# Altium PCB Main.PcbDoc
Units mil, origin at the board's own origin, x right, y up, seen from the top; angles counter-clockwise.
Board outline 2231.89 x 2481.84 mil, 2 copper layers (Top Layer, Bottom Layer); 54 components, 54 nets, 190 pads, 46 vias.
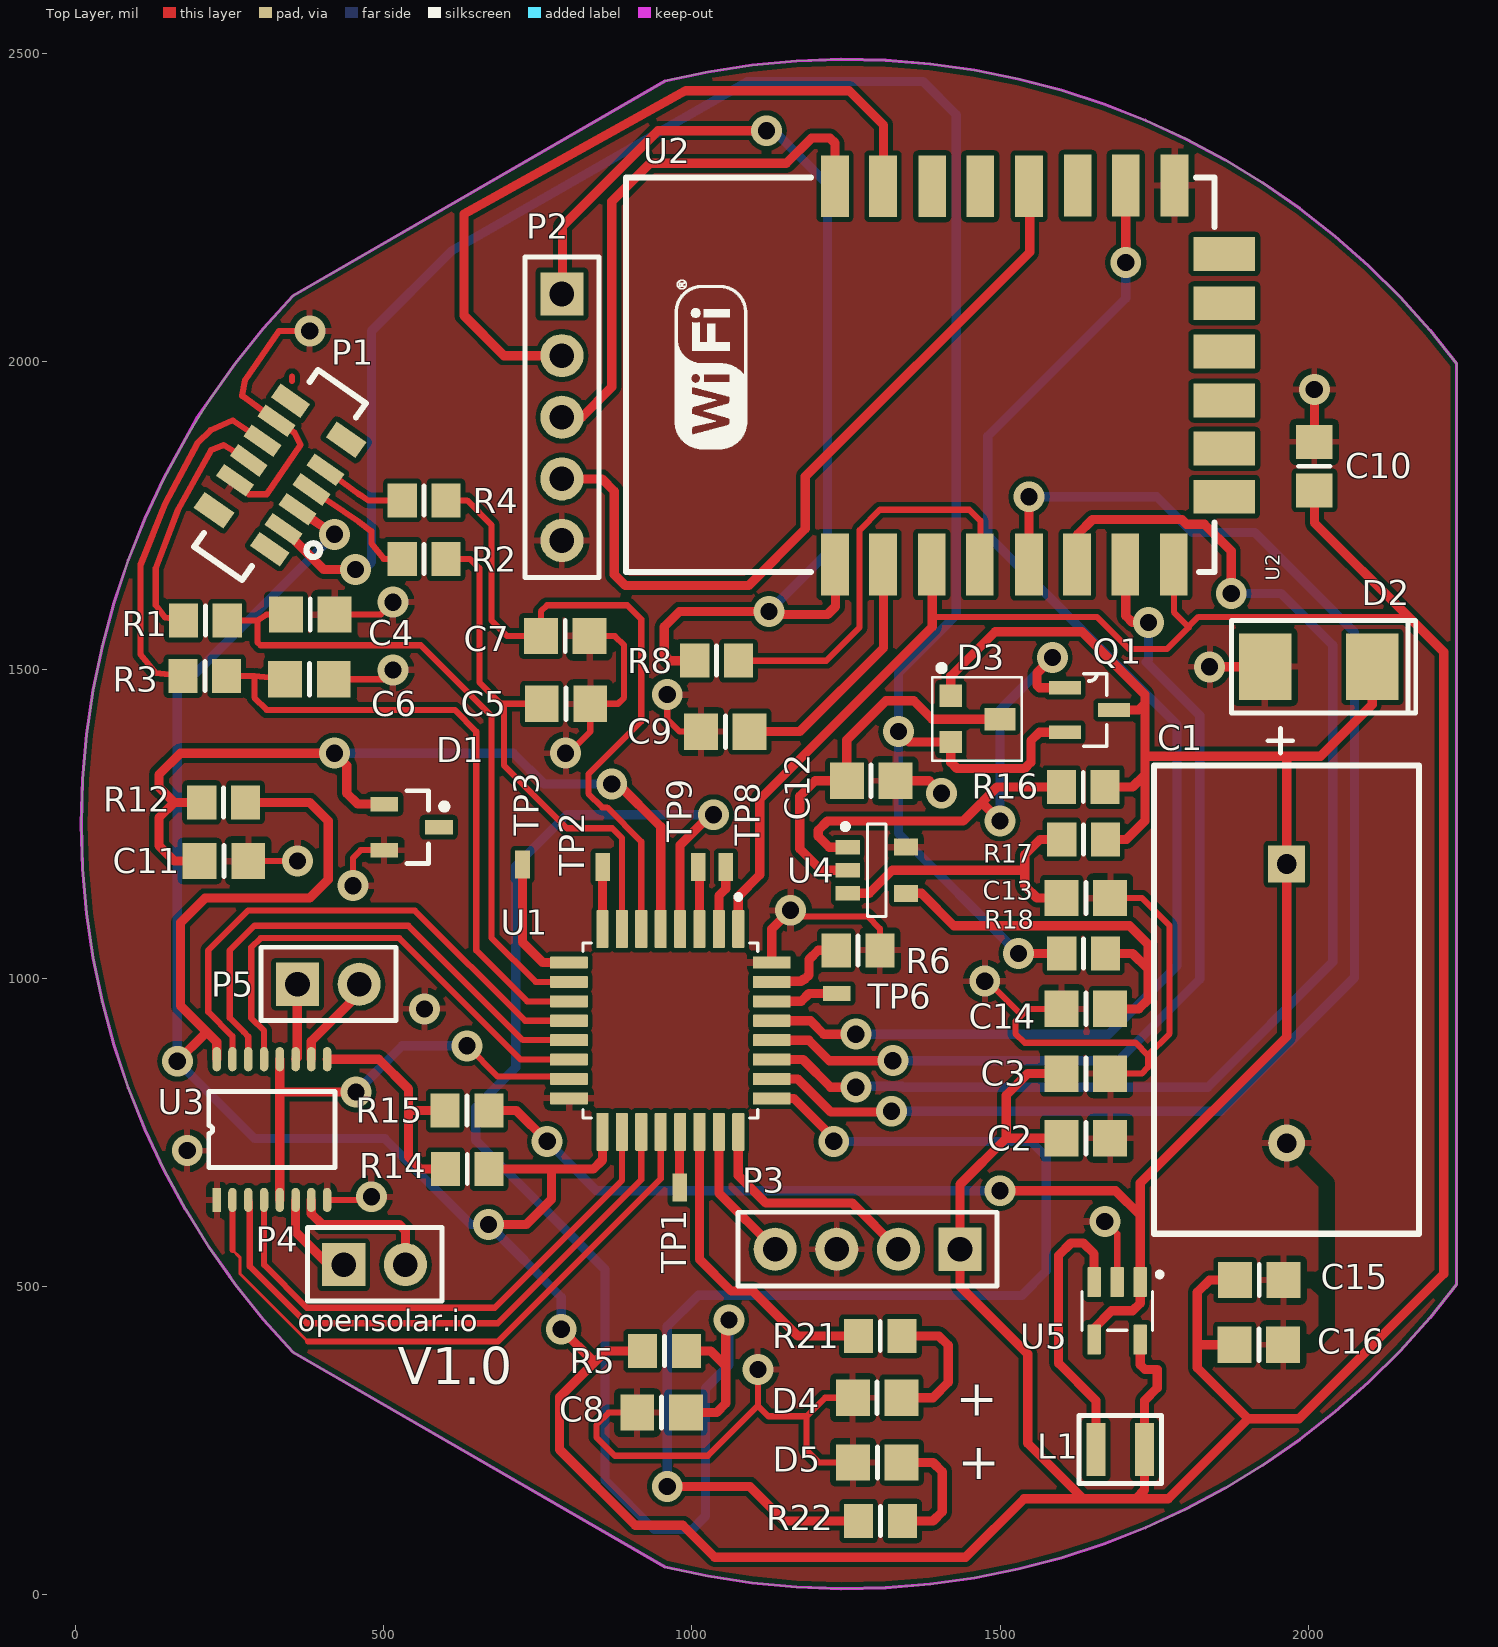
[diagram p0: Top Layer view]
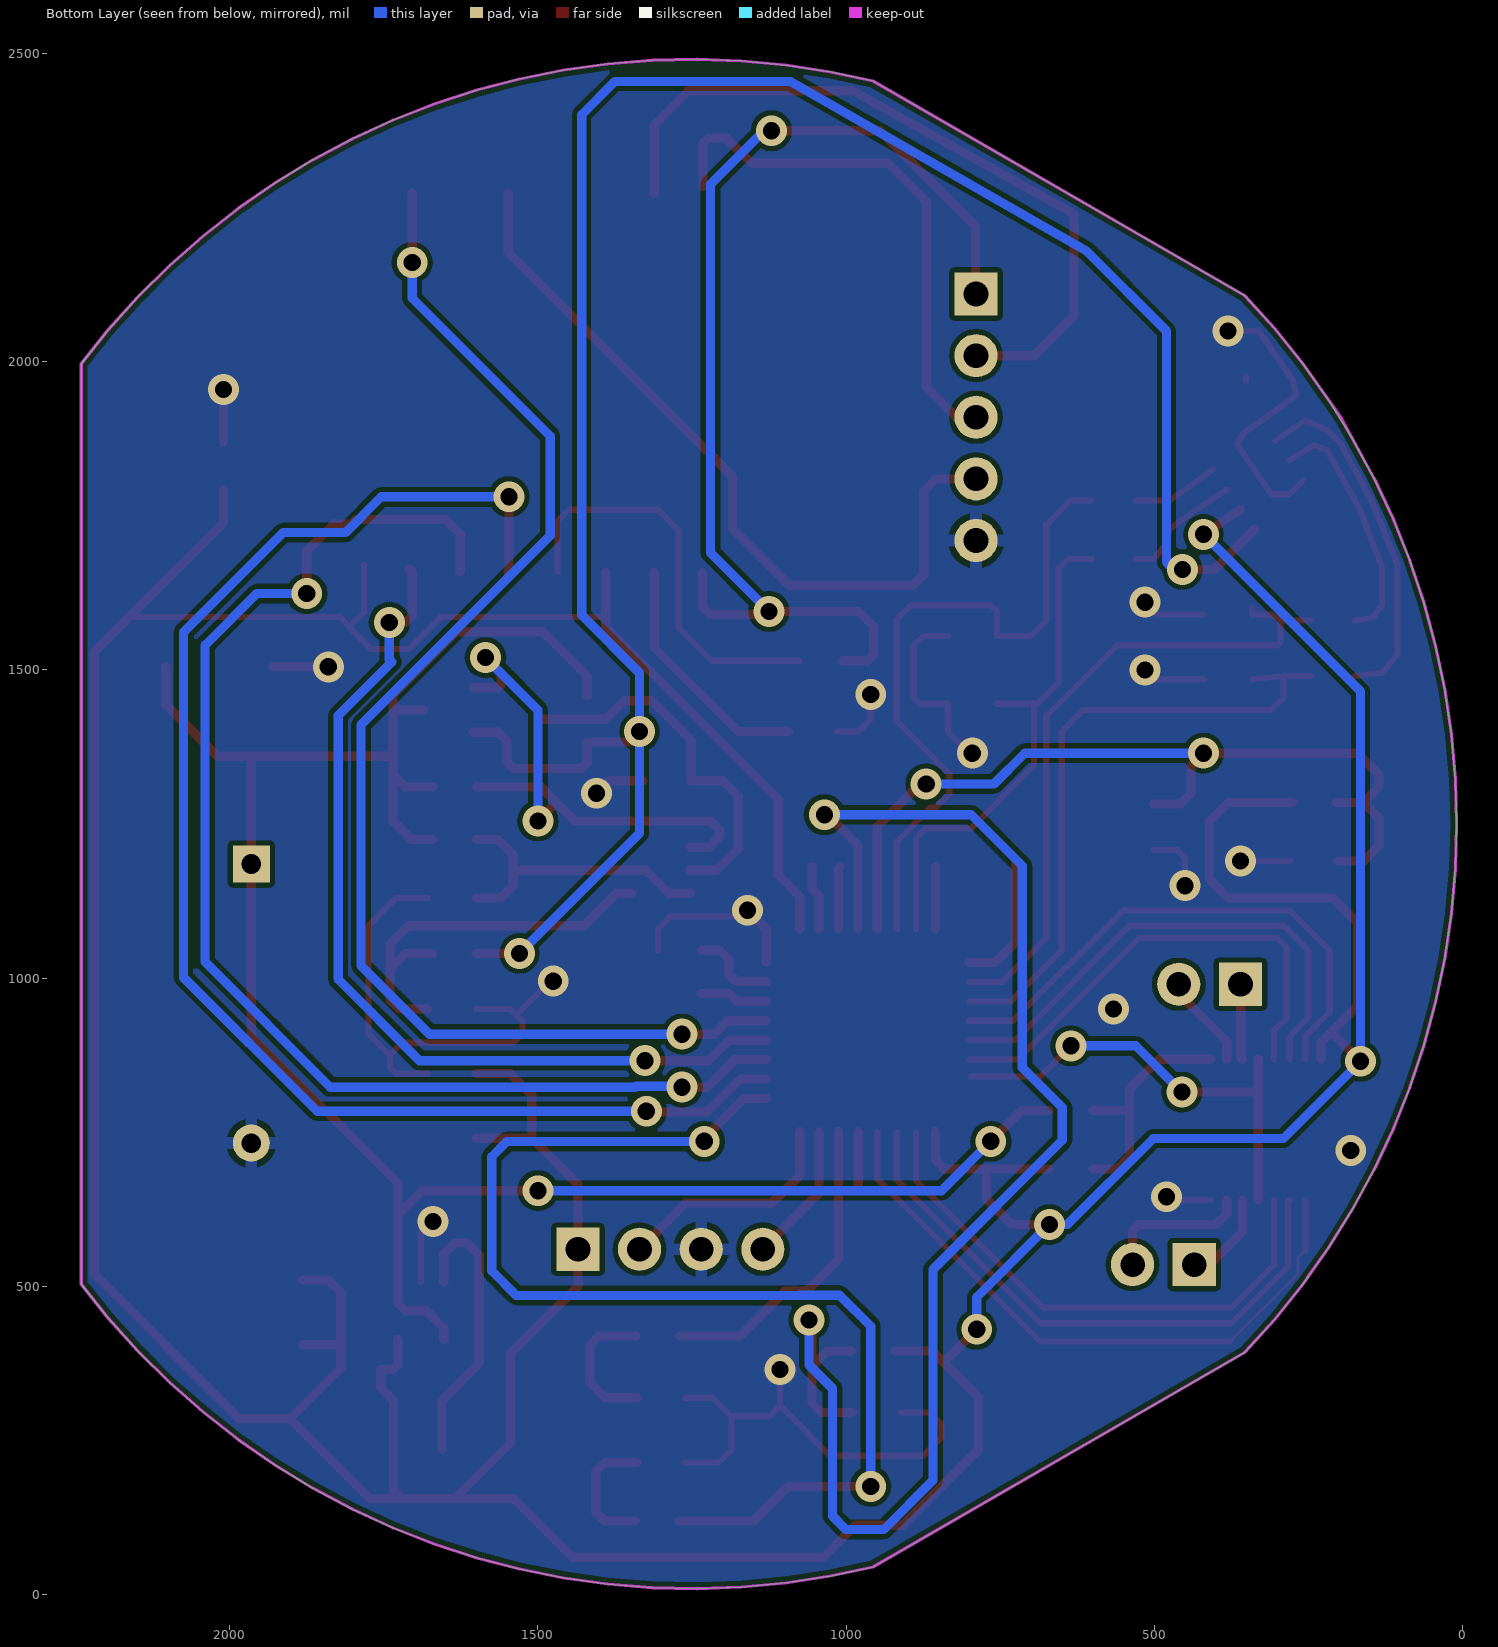
[diagram p1: Bottom Layer view, seen from below]

## Layer stack, top to bottom
Top Solder: solder mask 0.4, Solder Resist, Dk 3.5
Top Layer: signal copper 1.4
Dielectric 1: dielectric 12.6, FR-4, Dk 4.8
Bottom Layer: signal copper 1.4
Bottom Solder: solder mask 0.4, Solder Resist, Dk 3.5

## Board outline
259.08,503 251.65,513.48 250.88,514.25 cw(c254.41,517.81) 249.61,516.35 216.94,562.44 178.37,624.26 143.49,688.23 112.43,754.14 85.29,821.76 62.16,890.85 43.13,961.18 28.26,1032.51 17.61,1104.59 11.2,1177.17 9.06,1250 11.2,1322.83 17.61,1395.41 28.26,1467.49 43.13,1538.82 62.16,1609.15 85.29,1678.24 112.43,1745.86 143.49,1811.77 178.37,1875.74 216.94,1937.56 259.08,1997 304.63,2053.87 352.66,2107.11 956.4,2455.68 1026.07,2470.57 1097.63,2481.55 1169.72,2488.34 1242.08,2490.92 1314.46,2489.27 1386.63,2483.4 1458.33,2473.33 1529.32,2459.1 1599.37,2440.75 1668.22,2418.35 1735.65,2391.97 1801.42,2361.7 1865.32,2327.65 1927.12,2289.93 1986.62,2248.67 2043.61,2204 2097.9,2156.1 2149.3,2105.1 2197.64,2051.2 2240.95,1996.84 2240.95,503.16 2197.64,448.8 2149.3,394.9 2097.9,343.9 2043.61,296 1986.62,251.33 1927.12,210.07 1865.32,172.35 1801.42,138.3 1735.65,108.03 1668.22,81.65 1599.37,59.25 1529.32,40.9 1458.33,26.67 1386.63,16.6 1314.46,10.73 1242.08,9.08 1169.72,11.66 1097.63,18.45 1026.07,29.43 956.4,44.32 352.65,392.89 304.63,446.13

## Design rules (kind name [scope] priority, off if disabled: settings)
BoardOutlineClearance [All] p1: gap=7.87 ignorepadtopadclearanceinfootprint=FALSE except(15.75: Arc-SplitBarrior Arc-SplitContinuation Track-SplitBarrior Track-SplitContinuation SMDPad-SplitBarrior SMDPad-SplitContinuation THPad-SplitBarrior THPad-SplitContinuation Via-SplitBarrior Via-SplitContinuation Fill-SplitBarrior Fill-SplitContinuation Poly-SplitBarrior Poly-SplitContinuation Region-SplitBarrior Region-SplitContinuation Text-SplitBarrior Text-SplitContinuation)
Clearance "Clearance Bottom Layer" [OnLayer('Bottom Layer')] p1: gap=8 ignorepadtopadclearanceinfootprint=TRUE except(10: Arc-Text Track-Text SMDPad-Text THPad-Text Via-Text Fill-Text Poly-Text Region-Text Text-Text)
Clearance "Clearance Top Layer" [OnLayer('Top Layer')] p2: gap=8 ignorepadtopadclearanceinfootprint=TRUE except(10: Arc-Text Track-Text SMDPad-Text THPad-Text Via-Text Fill-Text Poly-Text Region-Text Text-Text)
Clearance [All] p3: gap=7.87 ignorepadtopadclearanceinfootprint=FALSE except(3.5: Arc-Arc Arc-Track Arc-SMDPad Track-Track Track-SMDPad SMDPad-SMDPad; 5: Arc-Via Track-Via SMDPad-Via THPad-Via Via-Via; 10: Arc-Text Track-Text SMDPad-Text THPad-Text Via-Text Fill-Text Poly-Text Region-Text Text-Text)
HoleSize [All] p1: absolutevalues=TRUE maxlimit=248.03 minlimit=7.87 maxpercent=80.000 minpercent=20.000
MinimumAnnularRing [All] p1: minimumring=3
MinimumSolderMaskSliver [All] p1: minsoldermaskwidth=3.94
PolygonConnect [All vs IsNamedPolygon('Top Layer-GND')] p1: connectstyle=Relief reliefconductorwidth=10 reliefentries=4 polygonreliefangle="90 Angle" airgapwidth=10
PolygonConnect PolygonConnect_1 [All] p2: thpad.connectstyle=Relief thpad.reliefconductorwidth=20 thpad.reliefentries=4 thpad.polygonreliefangle="90 Angle" thpad.airgapwidth=10 smdpad.connectstyle=Relief smdpad.reliefconductorwidth=20 smdpad.reliefentries=4 smdpad.polygonreliefangle="90 Angle" smdpad.airgapwidth=10 via.connectstyle=Direct via.reliefconductorwidth=20 via.reliefentries=4 via.polygonreliefangle="90 Angle" via.airgapwidth=10
RoutingCorners [All] p1: cornerstyle=Round minsetback=100 maxsetback=100
RoutingVias [All] p1: holewidth=19.68 width=39.37 viastyle="Through Hole" minholewidth=7.87 minwidth=17.72 maxholewidth=39.37 maxwidth=78.74
SilkToSilkClearance [All] p1: silktosilkclearance=3.94
SilkToSolderMaskClearance [IsPad] p1: minsilkscreentomaskgap=3.94 clearancetoexposedcopper=TRUE
SolderMaskExpansion [All] p1: expansion=4
Width [All] p1: maxlimit=100 minlimit=3.5 preferedwidth=15
25 further rules are at their usual default settings.

## Classes and differential pairs
component class power: C1 C12 C13 C14 C15 C16 D2 D3 L1 Q1 R16 R17 R18 U4 U5
component class Main: C2 C3 C4 C5 C6 C7 C8 C9 C10 C11 D1 D4 D5 P1 P2 P3 P4 P5 R1 R2 R3 R4 R5 R6 R8 R12 R14 R15 R21 R22 TP1 TP2 TP3 TP6 TP8 TP9 U U1 U2 U3

## Components (designator, comment, footprint, x,y, rotation, side; value= is the part's Value field where it differs from the comment)
C1 "Cap Pol1" SCMR22H155PSBB0 1965,1185 r270 top value=1.5F
C2 "1uF" 6-0805_M 1639.37,740 r180 top
C3 "1uF" 6-0805_M 1639.37,845 r180 top
C4 "1uF" 6-0805_M 380.63,1590 r180 top
C5 "1uF" 6-0805_M 795.63,1445 r180 top
C6 "1uF" 6-0805_M 379.37,1485 r180 top
C7 "1uF" 6-0805_M 794.37,1555 r180 top
C8 "1uF" 6-0805_M 950.63,295 r0 top
C9 "1uF" 6-0805_M 1054.37,1400 r0 top
C10 "1uF" 6-0805_M 2010,1830.63 r270 top
C11 "1uF" 6-0805_M 240.63,1190 r180 top
C12 "1uF" 6-0805_M 1290.63,1320 r180 top
C13 "1uF" 6-0805_M 1639.37,1130 r180 top
C14 "1uF" 6-0805_M 1639.37,950 r0 top
C15 "10uF" 6-0805_M 1920.63,510 r180 top
C16 "1uF" 6-0805_M 1920,405 r180 top value=100nF
D1 "LM4040D30FTA" SOT23_LM4040 545,1245 r0 top
D2 "1SMB5918BT3G" SMB 2017.01,1505 r0 top value=5.1V
D3 "BAT54CLT1G" SOT23-DUODIODE 1420,1458 r0 top
D4 "RED" 6-0805_M 1300.37,319 r180 top
D5 "BLUE" 6-0805_M 1301,214 r180 top
L1 "CIGW252010GL4R7MNE" "INDUCTOR_2520 - DUPLICATE1" 1695,235 r0 top value=4.7uH
P1 "Hall & PV" FFC_8 314.67,1696 r55 top
P2 "ESP serial" HEADER-1X5 789,2110 r0 top
P3 "ST-LINK" HEADER-1X4 1435,560 r270 top
P4 "roll motor" HEADER-1X2 435,535 r90 top
P5 "pitch motor" HEADER-1X2 360,990 r90 top
Q1 "PMV35EPER" PMV35EPER 1645,1435 r0 top
R1 "10K" 6-0805_N 210.43,1580 r180 top
R2 "10K" 6-0805_N 565.43,1680 r180 top
R3 "10K" 6-0805_N 209.57,1490 r180 top
R4 "10K" 6-0805_N 565.43,1775 r180 top
R5 "10K" 6-0805_N 955.43,395 r0 top
R6 "10K" 6-0805_N 1269.57,1045 r180 top
R8 "3.3K" 6-0805_N 1040,1515 r0 top
R12 "33R" 6-0805_N 240,1285 r0 top
R14 "0R" 6-0805_N 635.43,690 r0 top
R15 "10M" 6-0805_N 635,785 r0 top value=0R
R16 "1K" 6-0805_N 1635,1310 r0 top
R17 "10K" 6-0805_N 1635.43,1225 r180 top
R18 "10K" 6-0805_N 1635.43,1040 r0 top
R21 "47R" 6-0805_N 1305.57,419 r180 top
R22 "47R" 6-0805_N 1306,119 r180 top
TP1 "TEST_POINT" TEST_POINT_PAD 980,660 r90 top
TP2 "TEST_POINT" TEST_POINT_PAD 855,1180 r270 top
TP3 "TEST_POINT" TEST_POINT_PAD 725,1184 r270 top
TP6 "TEST_POINT" TEST_POINT_PAD 1235,975 r0 top
TP8 "TEST_POINT" TEST_POINT_PAD 1055,1180 r270 top
TP9 "TEST_POINT" TEST_POINT_PAD 1010,1180 r90 top
U1 "STM32L011K4T6" QFP80P900X900X160-32N 965,915 r270 top
U2 "ESP8266 ESP-12-E" "ESP8266 ESP-12-E" 1878,2324 r90 top
U3 "TB6652PNG" SSOP16_TB6652 228.82,640 r90 top
U4 "MIC7221YM5" MIC7221YM5 1300,1175 r90 top
U5 "PAM2301CAAB330" SOT95P280X100-5N 1690,460 r270 top

## Footprints (in the part's own frame and the unit in brackets; to place one, negate y for a bottom-side part, rotate by r counter-clockwise, add the part's x,y. Pads: shape width x height; smd on the part's side, far side on the other; paste and mask are expansions set on the pad)
6-0805_M [mm] "Chip Resistor, Body 2.0x1.2mm, IPC Low Density"
  rect 1.4x1.5 smd: 1(-1,0) 2(1,0)
  silkscreen extent 0,-0.65 0,0.65, body extent -1.07,-0.7 1.07,0.7, height 0.7
6-0805_N [mm] "Chip Resistor, Body 2.0x1.2mm, IPC Medium Density"
  rect 1.2x1.4 smd: 1(-0.9,0) 2(0.9,0)
  silkscreen extent 0,-0.6 0,0.6, body extent -1.07,-0.7 1.07,0.7, height 0.7
"ESP8266 ESP-12-E" [mil] "ESP8266 ESP-12-E"
  rect 100x45 smd: 1(-653,646) 2(-653,568) 3(-653,489) 4(-653,411) 5(-653,331) 6(-653,253) 7(-653,175) 8(-653,96) 15(-38,95) 16(-38,174) 17(-38,252) 18(-39,331) 19(-39,410) 20(-39,488) 21(-39,568) 22(-39,646)
  rect 55x100 smd: 9(-543,14) 10(-465,14) 11(-387,14) 12(-307,14) 13(-229,14) 14(-149,14)
  silkscreen extent -665,30 -25,985, body extent -661,37 -31,981, height 86
FFC_8 [mm]
  rect 0.6x1.5 smd: 1(1,0) 2(1.5,2.8) 3(2,0) 4(2.5,2.8) 5(3,0) 6(3.5,2.8) 7(4,0) 8(4.5,2.8)
  rect 0.7x1.5 smd: 9(5.5,2.8) 12(0,0)
  rect 0.8x1.5 smd: 10(5.5,0) 11(0,2.8)
  silkscreen extent -1.7,-1.78 7.2,2.6, body extent -1.7,0.2 7.2,2.6, height 4
HEADER-1X2 [mil]
  rect 70x70 hole 40: 1(0,0)
  round 70 hole 40: 2(0,-100)
  silkscreen extent -59,-159 60,59, body extent -50,-150 50,50, height 315
HEADER-1X4 [mil]
  rect 70x70 hole 40: 1(0,0)
  round 70 hole 40: 2(0,-100) 3(0,-200) 4(0,-300)
  silkscreen extent -60,-360 60,60, body extent -50,-350 50,50, height 470
HEADER-1X5 [mil]
  rect 70x70 hole 40: 1(0,0)
  round 70 hole 40: 2(0,-100) 3(0,-200) 4(0,-300) 5(0,-400)
  silkscreen extent -60,-460 60,60, body extent -50,-450 50,50, height 470
"INDUCTOR_2520 - DUPLICATE1" [mm]
  rect 0.8x2.2 smd: 1(-1,0) 2(1,0)
  silkscreen extent -1.7,-1.4 1.7,1.4
MIC7221YM5 [mm]
  rect 0.6x1 smd: 1(0.95,1.2) 2(0,1.2) 3(-0.95,1.2)
  rect 0.7x1 smd: 4(-0.95,-1.2) 5(0.95,-1.2)
  silkscreen extent -1.9,-0.38 1.9,1.4
PMV35EPER [mil] "MOSFET P SOT-23"
  rect 52x22 smd: 1(-40,36) 2(-40,-36) 3(40,0)
  silkscreen extent -9,-59 28,59
QFP80P900X900X160-32N [mm]
  rrect14% 1.56x0.5 smd mask+0.09: 1(-4.18,2.8) 2(-4.18,2) 3(-4.18,1.2) 4(-4.18,0.4) 5(-4.18,-0.4) 6(-4.18,-1.2) 7(-4.18,-2) 8(-4.18,-2.8) 17(4.18,-2.8) 18(4.18,-2) 19(4.18,-1.2) 20(4.18,-0.4) 21(4.18,0.4) 22(4.18,1.2) 23(4.18,2) 24(4.18,2.8)
  rrect14% 0.5x1.56 smd mask+0.09: 9(-2.8,-4.18) 10(-2,-4.18) 11(-1.2,-4.18) 12(-0.4,-4.18) 13(0.4,-4.18) 14(1.2,-4.18) 15(2,-4.18) 16(2.8,-4.18) 25(2.8,4.18) 26(2,4.18) 27(1.2,4.18) 28(0.4,4.18) 29(-0.4,4.18) 30(-1.2,4.18) 31(-2,4.18) 32(-2.8,4.18)
  silkscreen extent -5.6,-3.6 3.6,3.6
SCMR22H155PSBB0 [mil]
  rect 60x60 hole 32: 1(0,0)
  round 60 hole 31.5: 2(452.76,0)
  silkscreen extent -220,-215 600,215
SMB [mil]
  rect 85x107.99 smd: 1(-87.01,0) 2(87.01,0)
  silkscreen extent -142,-75 157,75
SOT23-DUODIODE [mil]
  rect 36x36 smd: 1(0,0) 2(0,-75)
  rect 50x36 smd: 3(80,-38)
  silkscreen extent -30,-105 115,50, body extent -4,-95 92,20, height 52
SOT23_LM4040 [mm] "SOT23, 3-Leads, Body 2.9x1.3mm, Pitch 0.95mm, Lead Span 2.3mm - Reverse Pinning, IPC Medium Density"
  rect 1.15x0.6 smd: 1(-1.125,-0.95) 2(-1.125,0.95) 3(1.125,0)
  silkscreen extent -0.2,-1.5 1.48,1.5, body extent -0.7,-1.5 0.7,1.5, height 1.1
SOT95P280X100-5N [mm]
  rrect14% 1.24x0.55 smd: 1(-1.185,0.95) 2(-1.185,0) 3(-1.185,-0.95) 4(1.185,-0.95) 5(1.185,0.95)
  silkscreen extent -1.6,-1.45 0.8,1.85
SSOP16_TB6652 [mm]
  rect 1x0.35 smd mask+0.102: 1(0,0)
  oval 1x0.35 smd mask+0.08: 2(0,-0.65) 3(0,-1.3) 4(0,-1.95) 5(0,-2.6) 6(0,-3.25) 7(0,-3.9) 8(0,-4.55) 9(5.8,-4.55) 10(5.8,-3.9) 11(5.8,-3.25) 12(5.8,-2.6) 13(5.8,-1.95) 14(5.8,-1.3) 15(5.8,-0.65) 16(5.8,0)
  silkscreen extent 1.33,-4.88 4.47,0.33
TEST_POINT_PAD [mm]
  rect 1.15x0.6 smd: 1(0,0)

## Part data
C1: "Polarized Capacitor (Radial)", LatestRevisionDate=17-Jul-2002, LatestRevisionNote="Re-released for DXP Platform.", PackageDescription="Polarized Capacitor (Radial); 2 Leads", PackageReference=RB7.6-15, Published=8-Jun-2000, Publisher="Altium Limited"
C2 C3 C4 C5 C6 C7 C8 C9 C10 C11 C12 C13 C14 C16: library part Cap, "Capacitor", jlc=C28323, LatestRevisionDate=17-Jul-2002, LatestRevisionNote="Re-released for DXP Platform.", PackageDescription="Radial Cap, Thru-Hole; 2 Leads; 0.3 in Pin Spacing", PackageReference=RAD-0.3, Published=8-Jun-2000, Publisher="Altium Limited"
C15: library part Cap, jlc=C15850, LatestRevisionDate=17-Jul-2002, LatestRevisionNote="Re-released for DXP Platform.", PackageDescription="Radial Cap, Thru-Hole; 2 Leads; 0.3 in Pin Spacing", PackageReference=RAD-0.3, Published=8-Jun-2000, Publisher="Altium Limited"
D1: library part "D Zener", "Zener Diode", LatestRevisionDate=17-Jul-2002, LatestRevisionNote="Re-released for DXP Platform.", PackageDescription="Diode, Thru-Hole; 2 Leads; 0.7 in Pin Spacing", PackageReference=DIODE-0.7, Published=8-Jun-2000, Publisher="Altium Limited"
D2: library part "D Zener", "Zener Diode", jlc=C142361, LatestRevisionDate=17-Jul-2002, LatestRevisionNote="Re-released for DXP Platform.", PackageDescription="Diode, Thru-Hole; 2 Leads; 0.7 in Pin Spacing", PackageReference=DIODE-0.7, Published=8-Jun-2000, Publisher="Altium Limited"
D3: library part BAT54C-SOT23, "DUAL SCHOTTKY DIODE COMMON CATHODE", Current - Average Rectified (Io) (per Diode)="200mA (DC)", Current - Reverse Leakage @ Vr="2µA @ 25V", jlc=C14308, Manufacturer="NXP Semiconductors", Manufacturer Part Number=BAT54C,215, Package / Case="SOT-23-3, TO-236-3, Micro3™, SSD3, SST3", Supplier Part Number=568-1612-1-ND, Voltage - DC Reverse (Vr) (Max)=30V, Voltage - Forward (Vf) (Max) @ If="800mV @ 100mA", Category="Discrete Semiconductor Products", Diode Configuration="1 Pair Common Cathode", Diode Type=Schottky, Mounting Type="Surface Mount", Packaging="Cut Tape (CT)", Reverse Recovery Time (trr)=5ns, RoHS="RoHS Compliant", Speed="Small Signal =< 200mA (Io), Any Speed", Supplier=Digi-Key, Supplier 1=Digi-Key, Supplier Part Number 1=568-1612-1-ND
D4: library part LED2, "Typical RED, GREEN, YELLOW, AMBER GaAs LED", jlc=C72037, LatestRevisionDate=17-Jul-2002, LatestRevisionNote="Re-released for DXP Platform.", PackageDescription="SM LED; 2 Flat Leads", PackageReference=3.2X1.6X1.1, PackageVersion=Feb-2002, Published=8-Jun-2000, Publisher="Altium Limited"
D5: library part LED2, "Typical RED, GREEN, YELLOW, AMBER GaAs LED", jlc=C72035, LatestRevisionDate=17-Jul-2002, LatestRevisionNote="Re-released for DXP Platform.", PackageDescription="SM LED; 2 Flat Leads", PackageReference=3.2X1.6X1.1, PackageVersion=Feb-2002, Published=8-Jun-2000, Publisher="Altium Limited"
L1: library part Inductor, "Inductor", jlc=C86070, Code_IEC=1005, Code_JEITA=0402, LatestRevisionDate=29-May-2009, LatestRevisionNote="IPC-7351 Footprint Added.", PackageDescription="Chip Inductor", PackageReference=0402-A, Published=8-Jun-2000, Publisher="Altium Limited"
P1: library part "Header 8", "Header, 8-Pin", LatestRevisionDate=17-Jul-2002, LatestRevisionNote="Re-released for DXP Platform.", Publisher="Altium Limited"
P2: library part "Header 5", "Header, 5-Pin", LatestRevisionDate=17-Jul-2002, LatestRevisionNote="Re-released for DXP Platform.", Publisher="Altium Limited"
P3: library part "Header 4", "Header, 4-Pin", LatestRevisionDate=17-Jul-2002, LatestRevisionNote="Re-released for DXP Platform.", Publisher="Altium Limited"
P4 P5: library part "Header 2", "Header, 2-Pin", LatestRevisionDate=17-Jul-2002, LatestRevisionNote="Re-released for DXP Platform.", Publisher="Altium Limited"
Q1: library part MOSFET-P, "P-Channel MOSFET", LatestRevisionDate=17-Jul-2002, LatestRevisionNote="Re-released for DXP Platform.", PackageDescription="TO, Flat Index; 3 In-Line, Axial Leads; Body Dia. 4.6mm; Lead Dia. 0.5 mm (max)", PackageReference=E3, PackageVersion=1995/1996, Published=8-Jun-2000, Publisher="Altium Limited"
R1 R2 R3 R4 R5 R6 R17 R18: library part Res1, "Resistor", jlc=C17414, LatestRevisionDate=17-Jul-2002, LatestRevisionNote="Re-released for DXP Platform.", PackageDescription="Axial Device, Thru-Hole; 2 Leads; 0.3 in Pin Spacing", PackageReference=AXIAL-0.3, Published=8-Jun-2000, Publisher="Altium Limited"
R8: library part Res1, "Resistor", jlc=C26010, LatestRevisionDate=17-Jul-2002, LatestRevisionNote="Re-released for DXP Platform.", PackageDescription="Axial Device, Thru-Hole; 2 Leads; 0.3 in Pin Spacing", PackageReference=AXIAL-0.3, Published=8-Jun-2000, Publisher="Altium Limited"
R12: library part Res1, "Resistor", jlc=C17634, LatestRevisionDate=17-Jul-2002, LatestRevisionNote="Re-released for DXP Platform.", PackageDescription="Axial Device, Thru-Hole; 2 Leads; 0.3 in Pin Spacing", PackageReference=AXIAL-0.3, Published=8-Jun-2000, Publisher="Altium Limited"
R14: library part Res1, "Resistor", jlc=C17477, LatestRevisionDate=17-Jul-2002, LatestRevisionNote="Re-released for DXP Platform.", PackageDescription="Axial Device, Thru-Hole; 2 Leads; 0.3 in Pin Spacing", PackageReference=AXIAL-0.3, Published=8-Jun-2000, Publisher="Altium Limited"
R15: library part Res1, "Resistor", jlc=C26108, LatestRevisionDate=17-Jul-2002, LatestRevisionNote="Re-released for DXP Platform.", PackageDescription="Axial Device, Thru-Hole; 2 Leads; 0.3 in Pin Spacing", PackageReference=AXIAL-0.3, Published=8-Jun-2000, Publisher="Altium Limited"
R16: library part Res1, "Resistor", jlc=C17513, LatestRevisionDate=17-Jul-2002, LatestRevisionNote="Re-released for DXP Platform.", PackageDescription="Axial Device, Thru-Hole; 2 Leads; 0.3 in Pin Spacing", PackageReference=AXIAL-0.3, Published=8-Jun-2000, Publisher="Altium Limited"
R21 R22: library part Res1, "Resistor", jlc=C17714, LatestRevisionDate=17-Jul-2002, LatestRevisionNote="Re-released for DXP Platform.", PackageDescription="Axial Device, Thru-Hole; 2 Leads; 0.3 in Pin Spacing", PackageReference=AXIAL-0.3, Published=8-Jun-2000, Publisher="Altium Limited"
U1: "ARM® Cortex®-M0 + STM32L0 Microcontrolador IC de 32 bits 32MHz 16KB _16K x 8_ FLASH 32-LQFP _7x7_", jlc=C87904, Package="LQFP-32 STMicroelectronics", Availability=Unavailable, MF=STMicroelectronics, MP=STM32L011K4T6, Price=None, SnapEDA_Link=https://www.snapeda.com/parts/STM32L011K4T6/STMicroelectronics/view-part/491202/?ref=snap
U4: library part MIC7221YM5-TR, "Comparator General Purpose Open Drain SOT-23-5", Package="SOT-23 Microchip", Availability=Unavailable, MF=Microchip, MP=MIC7221YM5-TR, Price=None, SnapEDA_Link=https://www.snapeda.com/parts/MIC7221YM5-TR/Microchip/view-part/1222183/?ref=snap
U5: library part PAM2301CAAB120, "Buck Switching Regulator IC Positive Fixed 1.2V 1 Output 800mA SOT-23-5 Thin, TSOT-23-5", jlc=C9051, Package="SOT-23-5 Diodes Inc.", Availability=Unavailable, MF="Diodes Inc.", MP=PAM2301CAAB120, Price=None, SnapEDA_Link=https://www.snapeda.com/parts/PAM2301CAAB120/Diodes%20Inc./view-part/924331/?ref=snap

## Via types
v1: diameter 50, hole 28, Top Layer to Bottom Layer, 46 vias

## Nets (pads, with @x,y where several pads share a name; then routed paths per layer and width w, separated by ;. In a path a pad name is that pad's centre, name@x,y a point inside that pad or via, vN(x,y) a via of type N, cw(c..) or ccw(c..) an arc to the next point about the centre after c; other vN are vias at no path point)
+3.3V: C2.2 C3.2 C10.2 C15.2 C16.2 L1.2 P1.3 P3.1 R5.1 R12.2 R14.2 U1.1 U1.17 U2.3 U2.8 U3.16 U5.5 | length 9745.5
  Top Layer w10: 1390,1586 1657,1586 1709,1534 1771,1534 1806.37,1569.37 ; U2.8 1782,1593.74 1805.74,1570 1821.74,1586 2163,1586
  Top Layer w15: v1(165,865) 210,910 210,915 ; U3.16 228.82,896.18 210,915 ; R12.2 380,1285 410,1255 410,1160 380,1130 210,1130 170,1090 170,955 210,915 ; P1.3 v1(420,1720) ; v1(670,600) 731,600 772,641 772,690 ; R14.2 772,690 ; v1(788,430) 841,377 841,376 ; U1.17 854.76,704.76 840,690 772,690 ; R5.1 860,395 841,376 ; U1.1 1075,1079.8 1075,1132.47 1110,1167.47 1110,1290 1390,1570 1390,1586 U2.3@1390,1659 ; C2.2 1510,740 ; C3.2 1545,845 1510,810 1510,740 ; U5.5 1727.4,372.6 1735,365 1755,365 1755,335 1734.37,314.37 L1.2 1734.37,169.37 1720,155 ; C16.2 1820,405 ; C15.2 1840,510 1820,490 1820,405 ; C10.2 2010,1739 2163,1586 2220,1529 2220,520 1985,285 1902.75,285 ; 841,376 785,320 785,235 908,112 985,112 1037,60 1444,60 1539,155 1635,155 ; 1510,740 1435,665 P3.1 1435,500 1545,390 1545,245 1635,155 ; 1635,155 1720,155 ; 1720,155 1772.75,155 1902.75,285 ; 1820,405 1820,367.75 1902.75,285
  Bottom Layer w15: v1(420,1720) 165,1465 v1(165,865) 290.5,739.5 501.51,739.5 641.01,600 v1(670,600) 788,482 v1(788,430)
GND: C1.2 C2.1 C3.1 C4.1 C5.1 C6.1 C7.1 C8.1 C9.1 C10.1 C11.1 C12.1 C13.1 C14.1 C15.1 C16.1 D1.1 D2.1 D4.2 D5.2 P1.2 P1.8 P2.5 P3.3 R6.1 U1.16 U1.32 U2.15 U3.1 U3.8 U4.5 U5.2 | length 3596.4
  Top Layer w10: P1.2 280.85,1785 310,1785 365,1865 355,1885 P1.8 270,1945 275,1970 330,2050 v1(380,2050) ; C11.1 v1(360,1190) ; U3.8 475,640 v1(480,645) ; C6.1 500,1485 v1(515,1500) ; C4.1 495,1590 v1(515,1610) ; v1(450,1150) 450,1195 462.6,1207.6 D1.1 ; v1(795,1365) 800,1365 835,1400 C5.1 880,1445 890,1455 890,1540 875,1555 C7.1 ; C8.1 865,295 845,275 845,255 875,225 1026,225 1107,306 ; v1(960,1460) 960,1420 980,1400 C9.1 ; v1(1107,365) 1107,306 ; v1(1160,1110) 1170,1100 1285,1100 1305,1080 R6.1 ; D4.2 1216,319 1186,289 ; D5.2 1206,214 1186,234 1186,289 ; v1(1475,995) 1480,995 1535,940 ; C14.1 1545,950 1535,940 ; v1(1670,605) 1690,585 U5.2 ; C3.1 1730,845 1740,855 1740,875 ; C13.1 1730,1130 1775,1085 1775,910 1740,875 ; 1107,306 1124,289 1186,289 ; 1535,940 1525,930 1525,910 1540,895 1720,895 1740,875
  Top Layer w15: U1.32 1129.57,1079.57 v1(1160,1110) ; C12.1 1385,1320 v1(1405,1300) ; v1(1840,1505) D2.1 ; C10.1 v1(2010,1955)
  other v1: 181,720 566,950
MOTOR_STBY: U1.15 U3.5 U3.12 | length 750.9
  Top Layer w3.5: U1.15@796.69,840 U1.15
  Top Layer w10: v1(635,890) 685,840 U1.15@796.69,840
  Top Layer w15: U3.5 331.18,815 ; U3.12 331.18,815 ; v1(455,815) 331.18,815
  Bottom Layer w15: v1(455,815) 530,890 v1(635,890)
NetC4_2: C4.2 R1.1 U1.10 | length 1089.3
  Top Layer w10: R1.1 295,1580 ; C4.2@341.26,1601.26 C4.2 310,1590 295,1580 ; U1.10 746.26,993.74 675,1065 675,1425 560,1540 300,1540 295,1545 295,1580
NetC5_2: C5.2 R2.1 U1.7 | length 849
  Top Layer w10: R2.1 640,1680 655,1665 655,1480 690,1445 695,1445 ; C5.2 695,1445 ; U1.7 886.26,1227.48 870.74,1243 797,1243 695,1345 695,1445
NetC6_2: C6.2 R3.1 U1.11 | length 1052.7
  Top Layer w10: R3.1 290,1490 ; C6.2 290,1490 ; U1.11 732.76,962.24 650,1045 650,1400 615,1435 310,1435 290,1455 290,1490
NetC7_2: C7.2 R4.1 U1.6 | length 1130.8
  Top Layer w10: R4.1 635,1775 675,1735 675,1580 700,1555 C7.2 755,1595 765,1605 895,1605 917.76,1582.24 917.76,1416.5 832,1330.74 832,1299.26 854.26,1277 862.2,1277 917.76,1221.44 U1.6
NetC8_2: C8.2 R5.2 U1.4 | length 2498.9
  Top Layer w15: U1.4 980.75,1215.75 1030,1265 v1(1035,1265) ; C8.2 1040,295 1055,310 1055,370 ; R5.2 1030,395 1055,370 ; v1(1060,445) 1055,440 1055,370
  Bottom Layer w15: v1(1035,1265) 797,1265 714,1182 714,855 649,790 649,737 859,527 859,185 939,105 1000,105 1022,127 1022,334 1060,372 v1(1060,445)
NetC9_2: C9.2 U2.2 | length 396.6
  Top Layer w15: C9.2 1175,1400 1311,1536 U2.2@1311,1659
NetC12_2: C12.2 D3.3 U4.2 | length 617.7
  Top Layer w15: U4.2 1210,1175 1175,1210 1175,1295 1200,1320 C12.2 1251.26,1386.26 1315,1450 1360,1450 1390,1420 D3.3
NetC13_2: C13.2 R17.2 U4.3 | length 491.4
  Top Layer w15: U4.3 1287.6,1137.6 1325,1175 1540,1175 ; C13.2 1560,1130 1540,1150 1540,1175 ; R17.2 1565,1225 1540,1200 1540,1175
NetC14_2: C14.2 R18.2 U4.4 | length 663.9
  Top Layer w15: U4.4 1372.4,1137.6 1425.03,1084.97 1710.03,1084.97 1740,1055 1740,1015 ; R18.2 1715,1040 1740,1015 ; C14.2 1725,950 1740,965 1740,1015
NetD4_1: D4.1 R21.1 | length 227.8
  Top Layer w15: D4.1 1391,319 1416,344 1416,404 1401,419 R21.1
NetD5_1: D5.1 R22.1 | length 207.6
  Top Layer w15: D5.1 1391,214 1406,199 1406,134 1391,119 R22.1
NetL1_1: L1.1 U5.3 | length 459
  Top Layer w15: U5.3 1652.6,552.4 1635,570 1615,570 1595,550 1595,375 1655.63,314.37 L1.1
NetP1_4: P1.4 R1.2 | length 397.5
  Top Layer w10: R1.2 145,1585 130,1605 130,1665 166,1760 220,1857 240,1865 P1.4
NetP1_5: P1.5 R2.2 | length 200.8
  Top Layer w10: P1.5@382.42,1792.75 460,1740 480,1725 480,1705 500,1680 R2.2
NetP1_6: P1.6 R3.2 | length 575.3
  Top Layer w10: R3.2 130,1495 105,1525 105,1670.29 145.49,1770 198.16,1868.66 219,1889 255,1905 P1.6
NetP1_7: P1.7 R4.2 | length 141
  Top Layer w10: P1.7 460,1785 475,1775 R4.2
NetP2_1: P2.1 R8.1 U2.1 | length 1823.1
  Top Layer w15: P2.1@790,2110 790,2220 945,2375 v1(1121,2375) ; R8.1 965,1515 955,1525 955,1570 980,1595 v1(1125,1595) 1130,1590 1220,1590 1233,1603 U2.1@1233,1659
  Bottom Layer w15: v1(1121,2375) 1133,2375 1220,2288 1220,1690 v1(1125,1595)
NetP2_2: P2.2 U2.21 | length 1218.9
  Top Layer w15: P2.2@790,2010 695,2010 630,2075 630,2240 990,2440 1255,2440 1311,2384 U2.21@1311,2273
NetP2_3: P2.3 U2.22 | length 880.3
  Top Layer w15: P2.3 821,1910 870,1959 870,2260 932,2322 1153,2322 1194,2363 1224,2363 1232,2355 U2.22
NetP2_4: P2.4 U2.18 | length 1278.6
  Top Layer w15: P2.4 854,1810 874,1790 874,1654.99 891.99,1637 1092,1637 1184,1729 1184,1814 1548,2178 U2.18@1548,2273
NetP4_1: P4.1 U3.6 | length 120
  Top Layer w15: U3.6 356.77,588.23 P4.1@405,540
NetP4_2: P4.2 U3.7 | length 241.4
  Top Layer w15: U3.7 382.36,617.64 400,600 525,600 535,590 P4.2
NetP5_1: P5.1 U3.11 | length 123
  Top Layer w15: U3.11 359.36,870.94 359.36,989.36 P5.1
NetP5_2: P5.2 U3.10 | length 153.8
  Top Layer w15: U3.10 382.36,897.36 460,975 P5.2
NetQ1_1: Q1.1 R16.1 U4.1 | length 933.3
  Top Layer w15: U4.1 1222.6,1212.4 1205,1230 1205,1240 1220,1255 1440,1255 1470,1285 ; v1(1500,1255) 1470,1285 ; v1(1585,1520) 1560,1495 1560,1475 1564,1471 Q1.1 ; R16.1 1495,1310 1470,1285
  Bottom Layer w15: v1(1500,1255) 1500,1435 v1(1585,1520)
NetR6_2: R6.2 U1.31 | length 140.4
  Top Layer w15: U1.31 1130.83,995 1177.47,995 1180.47,998 1183,998 1190,1005 1190,1030 1205,1045 R6.2
NetR8_2: R8.2 U2.4 | length 677.1
  Top Layer w10: R8.2 1218,1515 1272,1569 1272,1727 1305,1760 1450,1760 1468,1742 U2.4@1468,1659
NetR14_1: R14.1 R15.1 U3.9 | length 389.9
  Top Layer w15: U3.9 491.65,868.35 540,820 540,785 ; R15.1 540,785 ; R14.1 560,690 540,710 540,785
NetR21_2: R21.2 U1.22 | length 516.2
  Top Layer w15: U1.22 1012.24,543.76 1064,492 1099,492 1172,419 R21.2
NetR22_2: R22.2 U1.25 | length 1919.1
  Top Layer w15: v1(960,175) 1094,175 1150,119 R22.2 ; U1.25 1165.24,804.76 1230,740 v1(1230,735)
  Bottom Layer w15: v1(960,175) 960,435 1010.5,485.5 1076.78,485.5 1077.28,485 1535,485 1575,525 1575,710 1550,735 v1(1230,735)
NetTP1_1: TP1.1 U1.21 | length 90.7
  Top Layer w15: TP1.1 980,749.69 U1.21
NetTP2_1: TP2.1 U1.8 | length 100.5
  Top Layer w15: U1.8 854.76,1179.76 TP2.1
NetTP3_1: TP3.1 U1.9 | length 215
  Top Layer w15: TP3.1 725,1058 757.76,1025.24 U1.9
NetTP6_1: TP6.1 U1.30 | length 110.7
  Top Layer w15: U1.30 1177.24,962.24 1190,975 TP6.1
NetTP8_1: TP8.1 U1.2 | length 105.1
  Top Layer w15: U1.2 1043.74,1133.74 1055,1145 TP8.1
NetTP9_1: TP9.1 U1.3 | length 101.4
  Top Layer w15: TP9.1 1012.24,1177.76 U1.3
PITCH_CTL1: U1.12 U3.15 | length 880
  Top Layer w10: U3.15@255,868.94 U3.15 254.41,905.59 215,945 215,1045 279.5,1109.5 550.5,1109.5 729.25,930.75 U1.12
PITCH_CTL2: U1.13 U3.14 | length 833
  Top Layer w10: U3.14 280,905 272.41,912.59 272.41,913.05 250,935.46 250,1045 290,1085 540,1085 725.75,899.25 U1.13
PITCH_PWM: U1.14 U3.13 | length 793.5
  Top Layer w10: U3.13 305.59,914.41 285,935 285,1050 300,1065 525,1065 722.24,867.76 U1.14
PV: D3.2 P1.1 Q1.2 R18.1 | length 3558
  Top Layer w15: P1.1 402.5,1663 v1(454,1663) ; v1(1335,1400) 1352,1383 D3.2 1420,1350 1430,1340 1540,1340 1550,1350 1550,1385 1564,1399 Q1.2 ; v1(1530,1040) R18.1
  Bottom Layer w15: v1(454,1663) 468,1663 480,1675 480,2050 610,2180 1090,2455 1375,2455 1429,2401 1429,1589 1335,1495 v1(1335,1400) 1335,1235 v1(1530,1040)
ROLL_CTL1: U1.20 U3.2 | length 1038.6
  Top Layer w5: 254.41,558.85 266.33,546.92 266.33,520.74 377.07,410
  Top Layer w10: 254.41,558.85 U3.2 ; 377.07,410 685,410 949.25,674.25 U1.20
ROLL_CTL2: U1.19 U3.3 | length 956.4
  Top Layer w10: U3.3 282.58,637.42 282.58,532.02 374.6,440 685,440 917.76,672.76 U1.19
ROLL_PWM: U1.18 U3.4 | length 879.6
  Top Layer w10: U3.4 305.59,534.47 375.06,465 680,465 886.26,671.26 U1.18
SPI_CLK: U1.26 U2.5 | length 2359.7
  Top Layer w15: U1.26 1171.74,836.26 1225.5,782.5 1322.5,782.5 v1(1324,784) ; v1(1547,1781) U2.5 1547,1660 U2.5@1548,1659
  Bottom Layer w15: v1(1324,784) 1858,784 2075,1001 2075,1561 1913,1723 1812,1723 1754,1781 v1(1547,1781)
SPI_MISO: U1.27 U2.6 | length 2138.2
  Top Layer w15: U1.27 1180.24,867.76 1225,823 v1(1266,823) ; U2.6@1626,1659 1626,1720 1650,1744 1795,1744 1802.5,1736.5 1831.5,1736.5 1875,1693 v1(1875,1624)
  Bottom Layer w15: v1(1266,823) 1267.5,824.5 1340.78,824.5 1342.28,823 1837,823 2040,1026 2040,1540 1956,1624 v1(1875,1624)
SPI_MOSI: U1.28 U2.7 | length 1499.2
  Top Layer w15: U1.28 1189.75,899.25 1223,866 v1(1326,866) ; U2.7@1709,1664 1704,1659 1704,1588 1715,1577 v1(1741,1577)
  Bottom Layer w15: v1(1326,866) 1692,866 1824,998 1824,1426 1737,1513 1741,1517 v1(1741,1577)
SPI_SS: U1.29 U2.16 | length 2186.8
  Top Layer w15: U1.29 1192.25,930.75 1214,909 v1(1266,909) ; v1(1704,2161) 1704,2273 U2.16@1705,2274
  Bottom Layer w15: v1(1266,909) 1676,909 1787,1020 1787,1411 1480,1718 1480,1879 1704,2103 v1(1704,2161)
SWCLK: P3.2 U1.24 | length 380
  Top Layer w15: U1.24 1075.24,679.76 1120,635 1260,635 P3.2
SWDIO: P3.4 U1.23 | length 228.2
  Top Layer w15: U1.23 1043.74,651.26 P3.4
VREF: C11.2 D1.2 R12.1 U1.5 | length 1452.5
  Top Layer w15: C11.2 160,1190 135,1215 135,1260 160,1285 ; R12.1 160,1285 ; D1.2 457.6,1282.4 440,1300 440,1345 v1(420,1365) 170,1365 135,1330 135,1310 160,1285 ; v1(870,1315) 880,1315 949.25,1245.75 U1.5
  Bottom Layer w15: v1@410,1365 v1(420,1365) 710,1365 760,1315 v1(870,1315)
Vsu: C1.1 D2.2 D3.1 Q1.3 R15.2 R16.2 R17.1 U5.1 U5.4 | length 3515.9
  Top Layer w15: R15.2 715,785 v1(765,735) ; D3.1 1420,1490 1492,1562 1633,1562 1735,1460 1735,1445 ; v1(1500,655) 1687.4,655 1727.4,615 ; U5.4 1652.6,431.85 1680.75,460 1715,460 1727.4,472.4 U5.1 1727.4,615 ; R16.2 1715,1310 1735,1330 ; R17.1 1705,1225 1735,1255 1735,1330 ; Q1.3 1725,1435 1735,1445 ; D2.2 2104.02,1444.02 2020,1360 1965,1360 ; 1727.4,615 1727.4,667.4 1965,905 C1.1 1965,1360 ; 1735,1330 1735,1360 ; 1735,1360 1735,1445 ; 1735,1360 1965,1360
  Bottom Layer w15: v1(765,735) 845,655 v1(1500,655)
pads on no net: D1.3 P1.9 P1.10 P1.11 P1.12 U2.9 U2.10 U2.11 U2.12 U2.13 U2.14 U2.17 U2.19 U2.20
copper on no net: | length 7.4
  Top Layer w10: 351.15,1968.85 351.15,1976.22

## Polygon pours and split planes (outlines as drawn)
GND on Top Layer "Top Layer-GND" (solid, pour order 0): 346.89,2114.23 297.73,2059.74 251.84,2002.45 209.4,1942.57 170.55,1880.31 135.42,1815.87 104.13,1749.48 76.79,1681.37 53.5,1611.77 34.33,1540.92 19.35,1469.08 8.61,1396.47 2.15,1323.36 0,1250 2.15,1176.64 8.61,1103.53 19.35,1030.92 34.33,959.08 53.5,888.23 76.79,818.63 104.13,750.52 135.42,684.13 170.55,619.69 209.4,557.42 251.84,497.55 297.73,440.26 346.89,385.77 953.11,35.77 1024.43,20.52 1096.52,9.46 1169.13,2.62 1242.02,0.03 1314.93,1.69 1387.63,7.6 1459.85,17.74 1531.36,32.08 1601.92,50.56 1671.27,73.13 1739.19,99.7 1805.45,130.19 1869.81,164.49 1932.06,202.48 1992,244.05 2049.4,289.03 2104.09,337.29 2155.86,388.66 2204.56,442.95 2250,500 2250,2000 2204.56,2057.05 2155.86,2111.34 2104.09,2162.71 2049.4,2210.97 1992,2255.95 1932.06,2297.52 1869.81,2335.51 1805.45,2369.81 1739.19,2400.3 1671.27,2426.87 1601.92,2449.44 1531.36,2467.92 1459.85,2482.26 1387.63,2492.4 1314.93,2498.31 1242.02,2499.97 1169.13,2497.38 1096.52,2490.54 1024.43,2479.48 953.11,2464.23
GND on Bottom Layer "Bottom Layer-Ground" (solid, pour order 1): 346.89,2114.23 297.73,2059.74 251.84,2002.45 209.4,1942.57 170.55,1880.31 135.42,1815.87 104.13,1749.48 76.79,1681.37 53.5,1611.77 34.33,1540.92 19.35,1469.08 8.61,1396.47 2.15,1323.36 0,1250 2.15,1176.64 8.61,1103.53 19.35,1030.92 34.33,959.08 53.5,888.23 76.79,818.63 104.13,750.52 135.42,684.13 170.55,619.69 209.4,557.42 251.84,497.55 297.73,440.26 346.89,385.77 953.11,35.77 1024.43,20.52 1096.52,9.46 1169.13,2.62 1242.02,0.03 1314.93,1.69 1387.63,7.6 1459.85,17.74 1531.36,32.08 1601.92,50.56 1671.27,73.13 1739.19,99.7 1805.45,130.19 1869.81,164.49 1932.06,202.48 1992,244.05 2049.4,289.03 2104.09,337.29 2155.86,388.66 2204.56,442.95 2250,500 2250,2000 2204.56,2057.05 2155.86,2111.34 2104.09,2162.71 2049.4,2210.97 1992,2255.95 1932.06,2297.52 1869.81,2335.51 1805.45,2369.81 1739.19,2400.3 1671.27,2426.87 1601.92,2449.44 1531.36,2467.92 1459.85,2482.26 1387.63,2492.4 1314.93,2498.31 1242.02,2499.97 1169.13,2497.38 1096.52,2490.54 1024.43,2479.48 953.11,2464.23

## Keep-outs
Keep-Out Layer:
  lines w5: 9.06,1250 11.2,1177.17 17.61,1104.59 28.26,1032.51 43.13,961.18 62.16,890.85 85.29,821.76 112.43,754.14 143.49,688.23 178.37,624.26 216.94,562.44 249.61,516.35 ccw(c254.41,517.81) 250.88,514.25 251.65,513.48 259.08,503 304.63,446.13 352.65,392.89 956.4,44.32 1026.07,29.43 1097.63,18.45 1169.72,11.66 1242.08,9.08 1314.46,10.73 1386.63,16.6 1458.33,26.67 1529.32,40.9 1599.37,59.25 1668.22,81.65 1735.65,108.03 1801.42,138.3 1865.32,172.35 1927.12,210.07 1986.62,251.33 2043.61,296 2097.9,343.9 2149.3,394.9 2197.64,448.8 2240.95,503.16 2240.95,1996.84 2197.64,2051.2 2149.3,2105.1 2097.9,2156.1 2043.61,2204 1986.62,2248.67 1927.12,2289.93 1865.32,2327.65 1801.42,2361.7 1735.65,2391.97 1668.22,2418.35 1599.37,2440.75 1529.32,2459.1 1458.33,2473.33 1386.63,2483.4 1314.46,2489.27 1242.08,2490.92 1169.72,2488.34 1097.63,2481.55 1026.07,2470.57 956.4,2455.68 352.66,2107.11 304.63,2053.87 259.08,1997 195.84,1907.78 143.49,1811.77 112.43,1745.86 85.29,1678.24 62.16,1609.15 43.13,1538.82 28.26,1467.49 17.61,1395.41 11.2,1322.83 9.06,1250

## Silkscreen, mask and mechanical layers (free items; w line width, h text height)
Top Overlay:
  text "opensolar.io" at 360,427 h35
  text "V1.0" at 523,341 h60
  text "+" at 1428,290 h60
  text "+" at 1431,187 h60

## Text inside footprints (layer, text, board x,y; h text height)
U2: Mechanical 13 "ANTENNA AREA" at 917.41,1671.04 h10 r90; Mechanical 13 "CUTOUT POLYGON" at 937.41,1671.04 h10 r90